# Altium PCB demod_blank.PcbDoc
Units mil, origin at the board's own origin, x right, y up, seen from the top; angles counter-clockwise.
Board outline 1500 x 3550 mil, 2 copper layers (Top Layer, Bottom Layer); 43 components, 30 nets, 124 pads, 2 vias.
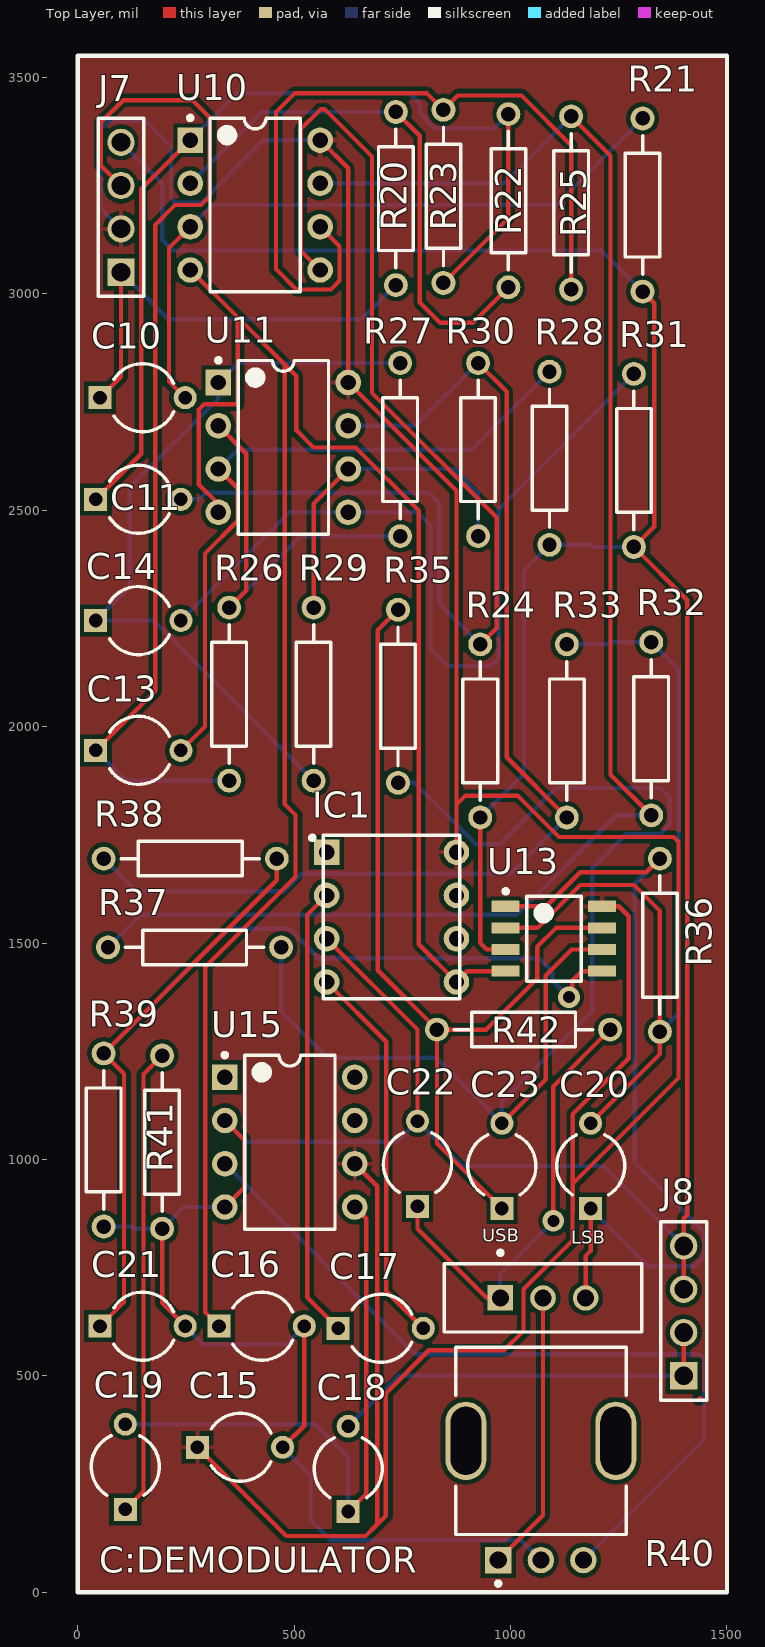
[diagram p0: Top Layer view]
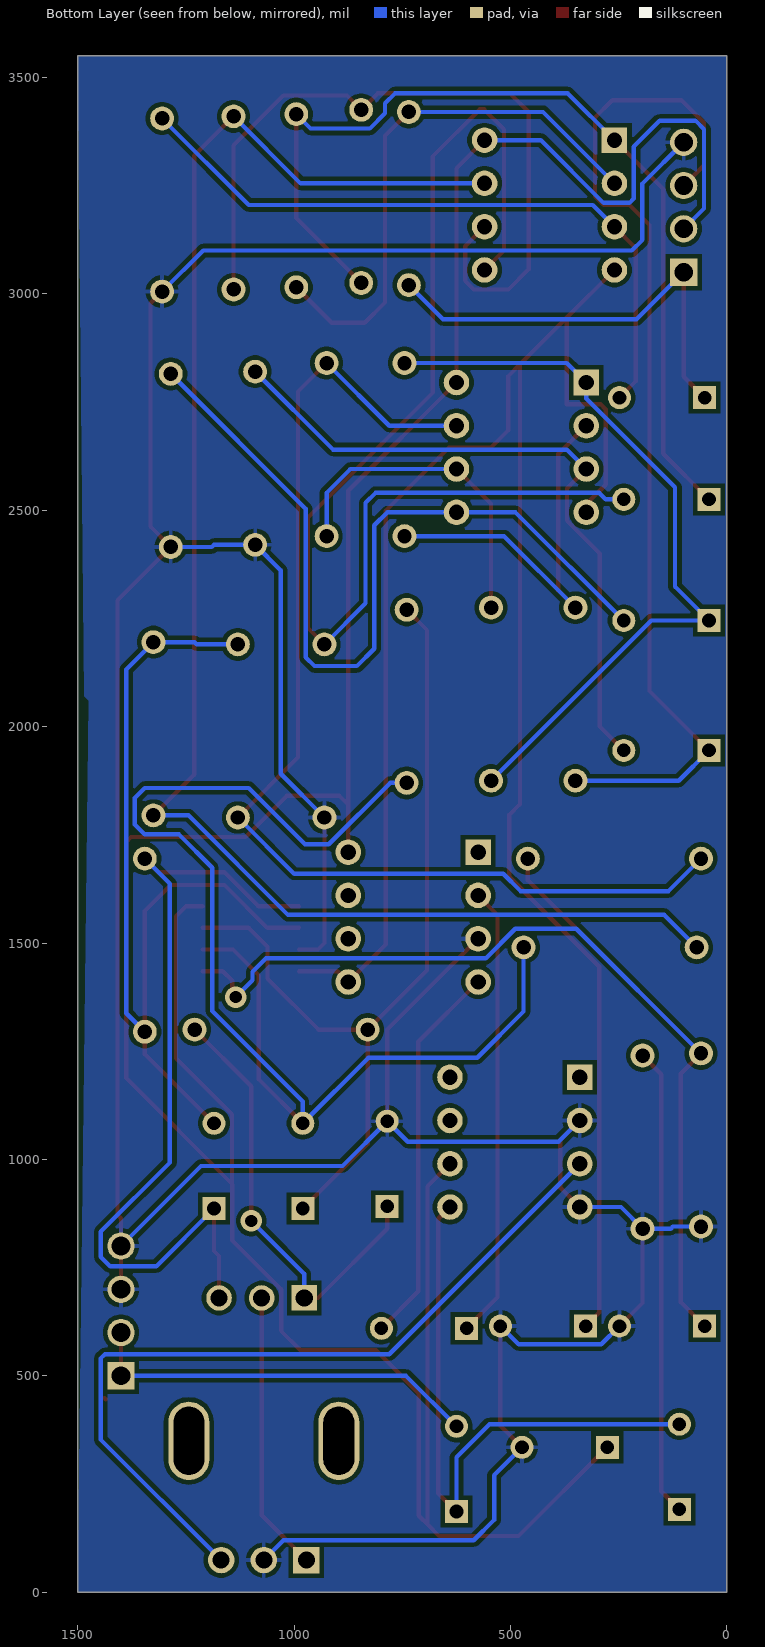
[diagram p1: Bottom Layer view, seen from below]

## Layer stack, top to bottom
Top Solder: solder mask 0.4, Solder Resist, Dk 3.5
Top Layer: signal copper 1.4
Dielectric 1: dielectric 12.6, FR-4, Dk 4.8
Bottom Layer: signal copper 1.4
Bottom Solder: solder mask 0.4, Solder Resist, Dk 3.5

## Board outline
0,0 0,3550 1500,3550 1500,0

## Design rules (kind name [scope] priority, off if disabled: settings)
Clearance [All] p1: gap=10 ignorepadtopadclearanceinfootprint=FALSE except(0: Arc-Hole Track-Hole SMDPad-Hole THPad-Hole Via-Hole Fill-Hole Poly-Hole Region-Hole Text-Hole)
PolygonConnect [All] p1: connectstyle=Relief reliefconductorwidth=10 reliefentries=4 polygonreliefangle="90 Angle" airgapwidth=10
RoutingVias [All] p1: holewidth=28 width=50 viastyle="Through Hole" minholewidth=28 minwidth=50 maxholewidth=28 maxwidth=50
SolderMaskExpansion [All] p1: expansion=4 istentingtop=FALSE
Width [All] p1: maxlimit=10 minlimit=10 preferedwidth=10
30 further rules are at their usual default settings.

## Classes and differential pairs
component class Twostagedesign: C10 C11 C13 C14 C15 C16 C17 C18 C19 C20 C21 C22 C23 IC1 J7 J8 R20 R21 R22 R23 R24 R25 R26 R27 R28 R29 R30 R31 R32 R33 R35 R36 R37 R38 R39 R40 R41 U10 U11 U15

## Components (designator, comment, footprint, x,y, rotation, side; value= is the part's Value field where it differs from the comment)
C10 "Cap2" CAPR5-4X5 150,2760 r0 top value=0.001uF
C11 "Cap2" CAPR5-4X5 140,2525 r0 top value=0.001uF
C13 "Cap2" CAPR5-4X5 140,1945 r0 top value=0.01uF
C14 "Cap2" CAPR5-4X5 140,2245 r0 top value=0.001uF
C15 "Cap Pol1" CAPR5-4X5 375,335 r0 top value=0.1uF
C16 "Cap Pol1" CAPR5-4X5 425,615 r0 top value=10uF
C17 "Cap Pol1" CAPR5-4X5 700,610 r0 top value=10uF
C18 "Cap Pol1" CAPR5-4X5 625,285 r90 top value=1000uF
C19 "Cap" CAPR5-4X5 110,290 r90 top value=0.1uF
C20 "Cap" CAPR5-4X5 1185,985 r90 top value=0.1uF
C21 "Cap" CAPR5-4X5 150,615 r0 top value=0.1uF
C22 "Cap" CAPR5-4X5 785,990 r90 top value=0.1uF
C23 "Cap" CAPR5-4X5 980,985 r90 top value=0.1uF
IC1 "ICL7660SIPAZ" DIP762W45P254L960H533Q8B 50725,51560 r0 top
J7 "IN" 61300411121 100,3200 r90 top
J8 "IN" 61300411121 1400,650 r90 top
R20 "Res2" AXIAL-0.4 735,3220 r90 top value=13.5k
R21 "Res2" AXIAL-0.4 1305,3205 r90 top value=13.5k
R22 "Res2" AXIAL-0.4 995,3215 r90 top value=13.5k
R23 "Res2" AXIAL-0.4 845,3225 r90 top value=91k
R24 "Res2" AXIAL-0.4 930,1990 r90 top value=91k
R25 "Res2" AXIAL-0.4 1140,3210 r90 top value=91k
R26 "Res2" AXIAL-0.4 350,2075 r90 top value=4.37k
R27 "Res2" AXIAL-0.4 745,2640 r90 top value=4.37k
R28 "Res2" AXIAL-0.4 1090,2620 r90 top value=4.37k
R29 "Res2" AXIAL-0.4 545,2075 r90 top value=180k
R30 "Res2" AXIAL-0.4 925,2640 r90 top value=180k
R31 "Res2" AXIAL-0.4 1285,2615 r90 top value=180k
R32 "Res2" AXIAL-0.4 1325,1995 r90 top value=1K
R33 "Res2" AXIAL-0.4 1130,1990 r90 top value=1K
R35 "Res2" AXIAL-0.4 740,2070 r90 top value=1K
R36 "Res2" AXIAL-0.4 1345,1495 r90 top value=1K
R37 "Res2" AXIAL-0.4 270,1490 r0 top value=1K
R38 "Res2" AXIAL-0.4 260,1695 r0 top value=1K
R39 "Res2" AXIAL-0.4 60,1045 r90 top value=1K
R40 "PTV09A-4020F-A203" FP-PTV09A-4020-MFG 1070,350 r0 top value=20kΩ
R41 "Res2" AXIAL-0.4 195,1040 r90 top value=10
R42 "Res2" AXIAL-0.4 1030,1300 r0 top value=1K
U10 "AD8032ANZ" ADI-N-8 410,3205 r0 top
U11 "AD8032ANZ" ADI-N-8 475,2645 r0 top
U13 "OPA1611AIDR" D0008A_M 1100,1510 r0 top
U15 "LM386N-1/NOPB" P0008A 490,1040 r0 top
? "EG1218" ESWI-EG1218_V 1075,680 r0 top

## Footprints (in the part's own frame and the unit in brackets; to place one, negate y for a bottom-side part, rotate by r counter-clockwise, add the part's x,y. Pads: shape width x height; smd on the part's side, far side on the other; paste and mask are expansions set on the pad)
61300411121 [mm] "Pin Header, pitch 2.54 mm, THT, Vertical, single row, 4p"
  rect 1.6x1.6 hole 1.1: 1(-3.81,0)
  round 1.6 hole 1.1: 2(-1.27,0) 3(1.27,0) 4(3.81,0)
  silkscreen extent -5.23,-1.34 5.23,1.34, body extent -5.08,-1.27 5.08,1.27, height 8.57
ADI-N-8 [mm] "DIP, 8-Leads, Body 9.59x6.6mm, Pitch 2.54mm"
  rect 1.5x1.5 hole 0.9: 1(-3.81,3.81)
  round 1.5 hole 0.9: 2(-3.81,1.27) 3(-3.81,-1.27) 4(-3.81,-3.81) 5(3.81,-3.81) 6(3.81,-1.27) 7(3.81,1.27) 8(3.81,3.81)
  silkscreen extent -3.93,-5.1 2.65,5.23, body extent -3.95,-5.07 3.95,5.07, height 5.33
AXIAL-0.4 [mm] "Axial Device, Thru-Hole; 2 Leads; 0.4 in Pin Spacing"
  round 1.4 hole 0.85: 1(-5.08,0) 2(5.08,0)
  silkscreen extent -4.06,-1.02 4.06,1.02
CAPR5-4X5 [mm] "Capacitor; 2 Leads"
  rect 1.35x1.35 hole 0.8: 1(-2.5,0)
  round 1.35 hole 0.8: 2(2.5,0)
  silkscreen extent -1.69,-2 1.82,2
D0008A_M [mm] "SOIC, 8-Leads, Body 5x4mm, Pitch 1.27mm, IPC Low Density"
  rrect15% 1.65x0.65 smd: 1(-2.825,1.905) 2(-2.825,0.635) 3(-2.825,-0.635) 4(-2.825,-1.905) 5(2.825,-1.905) 6(2.825,-0.635) 7(2.825,0.635) 8(2.825,1.905)
  silkscreen extent -2.95,-2.5 1.6,2.9, body extent -3,-2.45 3,2.45, height 1.63
DIP762W45P254L960H533Q8B [mm] "DIP, 8-Leads, Body 9.6x7.95mm, Pitch 2.54mm"
  rect 1.5x1.5 hole 0.9 mask+0.051: 1(-1273.81,-1266.19)
  round 1.5 hole 0.9 mask+0.051: 2(-1273.81,-1268.73) 3(-1273.81,-1271.27) 4(-1273.81,-1273.81) 5(-1266.19,-1273.81) 6(-1266.19,-1271.27) 7(-1266.19,-1268.73) 8(-1266.19,-1266.19)
  silkscreen extent -1274.77,-1274.8 -1266,-1265.2, body extent -1273.97,-1274.79 -1266.03,-1265.21, height 5.34
ESWI-EG1218_V [mm] "THD, 3-Leads, Body 11.6x4mm, Pitch 2.5mm"
  rect 1.5x1.5 hole 1: 1(-2.5,0)
  round 1.5 hole 1: 2(0,0) 3(2.5,0)
  silkscreen extent -5.8,-2 5.8,2.77, body extent -5.8,-2 5.8,2, height 7.4
FP-PTV09A-4020-MFG [mm]
  rect 1.55x1.55 hole 1 paste-1000 mask+0: 1(-2.5,-7)
  round 1.55 hole 1 paste-1000 mask+0: 2(0,-7) 3(2.5,-7)
  rrect100% 2.4x4.6 hole 4 slot 1.8 at 0 deg paste-1000 mask+0: 4(-4.4,0) 5(4.4,0)
  silkscreen extent -5,-8.5 5,5.5, body extent -5.8,-7.88 5.8,5.6, height 0.25
P0008A [mm] "DIP, 8-Leads, Body 10.15x6.6mm, Pitch 2.54mm"
  rect 1.5x1.5 hole 0.9: 1(-3.81,3.81)
  round 1.5 hole 0.9: 2(-3.81,1.27) 3(-3.81,-1.27) 4(-3.81,-3.81) 5(3.81,-3.81) 6(3.81,-1.27) 7(3.81,1.27) 8(3.81,3.81)
  silkscreen extent -3.93,-5.1 2.65,5.23, body extent -3.95,-5.07 3.95,5.07, height 5.08

## Part data
C10 C11 C14: "Capacitor", Supplier Part Number 1=598-CD19FD102FO3F, PackageDescription="Capacitor; 2 Leads", PackageReference=CAPR5-4X5, Published=23-Sep-2002, Publisher="Altium Limited", Supplier 1=Mouser
C13: "Capacitor", Supplier Part Number 1=598-CD19FA103FO3F, PackageDescription="Capacitor; 2 Leads", PackageReference=CAPR5-4X5, Published=23-Sep-2002, Publisher="Altium Limited", Supplier 1=Mouser
C15 C16 C17 C18: "Polarized Capacitor (Radial)", LatestRevisionDate=17-Jul-2002, LatestRevisionNote="Re-released for DXP Platform.", PackageDescription="Polarized Capacitor (Radial); 2 Leads", PackageReference=RB7.6-15, Published=8-Jun-2000, Publisher="Altium Limited"
C19 C20 C21 C22 C23: "Capacitor", LatestRevisionDate=17-Jul-2002, LatestRevisionNote="Re-released for DXP Platform.", PackageDescription="Radial Cap, Thru-Hole; 2 Leads; 0.3 in Pin Spacing", PackageReference=RAD-0.3, Published=8-Jun-2000, Publisher="Altium Limited"
IC1: library part CMP-00572-88254228-1, "ICL7660SIPAZ Charge Pump INV/STPUP/STPDN -1.5V to -12V/1.5V to 22.8V 45mA 8-Pin PDIP Tube", Frequency=10kHz, Output Current=45mA, Output Voltage=-1.5V, NexarPartId=88254228, Output Type=Adjustable, Packaging="Cut Tape", RoHS=Compliant
J7 J8: library part MHDR1X4, "Header, 4-Pin", LatestRevisionDate=17-Jul-2002, LatestRevisionNote="Re-released for DXP Platform.", Publisher="Altium Limited"
R20 R21 R22: "Resistor", Supplier Part Number 1=ALSR5J-13.5K-ND, LatestRevisionDate=17-Jul-2002, LatestRevisionNote="Re-released for DXP Platform.", PackageDescription="Axial Device, Thru-Hole; 2 Leads; 0.4 in Pin Spacing", PackageReference=AXIAL-0.4, Published=8-Jun-2000, Publisher="Altium Limited", Supplier 1=Digikey
R23 R24 R25: "Resistor", Supplier Part Number 1=603-MFR-25FTE52-91K, LatestRevisionDate=17-Jul-2002, LatestRevisionNote="Re-released for DXP Platform.", PackageDescription="Axial Device, Thru-Hole; 2 Leads; 0.4 in Pin Spacing", PackageReference=AXIAL-0.4, Published=8-Jun-2000, Publisher="Altium Limited", Supplier 1=Mouser
R26 R27 R28: "Resistor", Supplier Part Number 1=RN55C4371BB14-ND, LatestRevisionDate=17-Jul-2002, LatestRevisionNote="Re-released for DXP Platform.", PackageDescription="Axial Device, Thru-Hole; 2 Leads; 0.4 in Pin Spacing", PackageReference=AXIAL-0.4, Published=8-Jun-2000, Publisher="Altium Limited", Supplier 1=Digikey
R29 R30 R31: "Resistor", Supplier Part Number 1=594-MBB02070C1803DC1, LatestRevisionDate=17-Jul-2002, LatestRevisionNote="Re-released for DXP Platform.", PackageDescription="Axial Device, Thru-Hole; 2 Leads; 0.4 in Pin Spacing", PackageReference=AXIAL-0.4, Published=8-Jun-2000, Publisher="Altium Limited", Supplier 1=Mouser
R32 R33 R35 R36 R37 R38 R39 R41 R42: "Resistor", Supplier Part Number 1=RNMF14FTC2K00, LatestRevisionDate=17-Jul-2002, LatestRevisionNote="Re-released for DXP Platform.", PackageDescription="Axial Device, Thru-Hole; 2 Leads; 0.4 in Pin Spacing", PackageReference=AXIAL-0.4, Published=8-Jun-2000, Publisher="Altium Limited", Supplier 1="Arrow Electronics"
R40: library part CMP-07234-000017-1, "POT 20K OHM 1/20W CARBON LOG", Manufacturer="Bourns Inc.", Package=PTV09A-4020, Power Rating=0.05W, Resistance=20kΩ, Temperature="-10°C to +50°C", Temperature Range High=+50°C, Temperature Range Low=-10°C, Tolerance=20%, Voltage Rating=50V, Automotive=No, Category=Res, ComponentLink2Description=Datasheet, ComponentLink2URL=https://www.bourns.com/docs/product-datasheets/ptv09.pdf?sfvrsn=5e1089f1_12, Composition=Carbon, Device Class L1="Passive Components", Device Class L2=Resistors, Device Class L3="Variable Resistors and Potentiometers", Digikey Description="POT 20K OHM 1/20W CARBON LOG", Height=20.5mm, Lead Free=Yes, Manufacturer Part Number=PTV09A-4020F-A203, Mouser Description="Potentiometers 20K AUDIO 20%", Octopart=https://octopart.com/ptv09a-4020f-a203-bourns-1637636, RoHS=TRUE, Series=PTV09
U10 U11: library part CMP-0384-00245-2, "Double Channel RRIO Operational Amplifier, 80 MHz BW, 35 V/us SR, Industrial, 8-pin DIP (N-8), Tube", Amplifiers Per Package=2, Generic Part Number=AD8032, Input Bias Current=450nA, Input Offset Voltage=1mV, Manufacturer="Analog Devices", Code_JEDEC=MS-001, ComponentLink1Description="Manufacturer URL", ComponentLink1URL=http://www.analog.com/en/index.html, ComponentLink2Description=Datasheet, ComponentLink2URL=http://www.analog.com/static/imported-files/data_sheets/AD8031_8032.pdf, ComponentLink3Description="Package Specification", ComponentLink3URL=http:/www.analog.com/static/imported-files/packages/PKG_PDF/PDIP(N)/N_8.pdf, ComponentLink4Description="Reference Circuit", ComponentLink4URL=http://www.analog.com/en/all-operational-amplifiers-op-amps/operational-amplifiers-op-amps/ad8032/products/product.html#product-recommendations, DatasheetVersion="Rev. D", Iq/Amp=1.6mA, Mounting Technology="Through Hole", PackageDescription="8-Pin Plastic Dual In-Line Package, Row spacing 7.62 mm, Pitch 2.54 mm", PackageReference=N-8, PackageVersion=070606-A, Packing=Tube, PartNumber=AD8032ANZ, RevisionNote="Reference Circuit URL fixed", Slew Rate=35V/us, Small Signal Bandwidth=80MHz, V Span Max=12V, V Span Min=2.7V
U13: library part CMP-0808-00013-2, "1.1 nV/rtHz Noise, Low Power, Precision Operational Amplifier, 4.5 to 36 V, -40 to 85 degC, 8-pin SOIC (D8), Green (RoHS & no Sb/Br)", Manufacturer="Texas Instruments", PartNumber=OPA1612AID, Code_JEDEC=MS-012, ComponentLink1Description="Manufacturer URL", ComponentLink1URL=http://www.ti.com/, ComponentLink2Description=Datasheet, ComponentLink2URL=http://www.ti.com/general/docs/lit/getliterature.tsp?genericPartNumber=OPA1612&fileType=pdf, ComponentLink3Description="Package Specification", ComponentLink3URL=http://www.ti.com/litv/pdf/msoi002j, DatasheetVersion=SBOS450B, Eco-Plan="Green (RoHS & no Sb/Br)", GBW(Typ)(MHz)=40, Iq per channel(Max)(mA)=4.5, Mounting Technology="Surface Mount", Number of Channels=2, PackageDescription="8-Pin Plastic Small Outline, Body 4.9 x 3.9 mm, Pitch 1.27 mm", PackageReference=D0008A, PackageVersion="4040047-3/M, 06/2011", SubFamily="Audio Operational Amplifier", Vmax(V)=36, Vmin(V)=4.5, Vn at Flatband(Typ)(nV/rtHz)=1.1
U15: library part CMP-0057-00052-4, "Low Voltage Audio Power Amplifier, 8-pin MDIP, Pb-Free", Manufacturer="Texas Instruments", PackageTopMarking=NSUZXYTTE#*LM*386N-1, PowerWise=N, Code_JEDEC=MS-001-BA, ComponentLink1Description="Datasheet URL", ComponentLink1URL=http://www.ti.com/general/docs/lit/getliterature.tsp?genericPartNumber=LM386&fileType=pdf, CompType="Audio IC", PackageDescription="MDIP, .365 x .250 x .130in, 8 Lead, .100in Pitch", PackageReference=P0008A, PinCount=8, RoHS=Y
?: library part CMP-1696-00002-1, "Slide Switch, 500 V, -20 to 70 degC, 3-Pin THD, RoHS", Case\Package=SOT-23-5, Dropout Voltage="300 mV", Max Input Voltage="8 V", Max Operating Temperature="85 degC", Max Ouput Current="150 mA", Max Power Dissipation="250 mW", Min Input Voltage="4.3 V", Min Operating Temperature="-40 degC", Nominal Output Voltage="3.3 V", Package Quantity=3000, ComponentLink1Description="Manufacturer URL", ComponentLink1URL=http://www.e-switch.ch/en/, ComponentLink2Description=Datasheet, ComponentLink2URL=https://www.e-switch.com/system/asset/product_line/data_sheet/119/EG.pdf, DatasheetVersion=Oct-15, Height="1.3 mm", Length="3 mm", Mount="Surface Mount", Output Current="150 mA", Output Voltage="3.3 V", Outputs=1, PackageDescription="3-Pin Through Hole Device, Body 11.6 x 4 mm, Pitch 2.5 mm", PackageReference=EG1218, Packaging="Tape and Reel", Pins=5, Power Rating="250 mW", Radiation Hardening=No, REACH SVHC="No SVHC", RoHSCompliant=true, Width="1.8 mm"

## Via types
v1: diameter 50, hole 28, Top Layer to Bottom Layer, 2 vias

## Nets (pads, with @x,y where several pads share a name; then routed paths per layer and width w, separated by ;. In a path a pad name is that pad's centre, name@x,y a point inside that pad or via, vN(x,y) a via of type N, cw(c..) or ccw(c..) an arc to the next point about the centre after c; other vN are vias at no path point)
+5: C15.1 IC1.8 J7.2 U10.8 U11.8 U13.8 U15.6 | length 7521.7
  Top Layer w10: C15.1 481.57,130 665,130 692,157 ; U10.8 625,3290 U11.8 875,2545 875,1820 ; U15.6 692,938 692,157 ; IC1.8 875,1820 ; U13.8 1250,1585 1273,1562 1273,1234 1143.42,1104.42 1143.42,943.42 ; 692,157 712,177 712,460 811,559 985,559 1030,604 1030,700 1143,813 ; 875,1820 895,1840 1017,1840 1112,1745 1377,1745 1388,1734 1388,1188 1143.42,943.42 ; 1143,813 1143,943 1143.42,943.42 ; 1143,813 1143.42,943.42
  Bottom Layer w10: J7.2 53,3197 53,3380 73,3400 155.47,3400 215.47,3340 215.47,3220 225.47,3210 285,3210 430,3355 U10.8
GND: C15.2 C16.2 C21.2 C22.2 IC1.3 J7.4 J8.3 J8.4 R21.1 R24.1 R28.1 R31.1 R39.1 R40.2 R41.1 U13.3 U15.2 U15.4 | length 8953.1
  Top Layer w10: R41.1 195,668.43 C21.2 ; U15.4 385,935 385,1045 U15.2 ; C15.2 523.43,385 C16.2 ; IC1.3 785,1300 C22.2 ; R24.1 930,1500 945,1485 U13.3 ; R21.1 1332,2978 1332,2462 R31.1 1408,2292 1408,872 1400,864 J8.4 J8.3
  Bottom Layer w10: R39.1 125,845 130,840 R41.1 245,890 U15.4 ; J7.4 195.47,3254.53 195.47,3124.53 220,3100 1210,3100 R21.1 ; C21.2 290.43,573 481.43,573 C16.2 ; U15.2 389,1041 737.57,1041 C22.2 888.43,985 1215,985 J8.4 ; C15.2 538,270.43 538,167 585,120 1024.41,120 R40.2 ; R24.1 1031,1891 1031,2361 R28.1 1185,2420 1190,2415 R31.1
Net_1: ?.1 C22.1 R42.2 | length 1034.4
  Top Layer w10: C22.1 785,840 945,680 ?.1 ; v1(1099,858) 1099,1169 R42.2
  Bottom Layer w10: ?.1 976.58,735.58 v1(1099,858)
Net_2: ?.2 R40.1 | length 648.4
  Top Layer w10: R40.1 1075,177.84 ?.2
Net_3: ?.3 C20.1 R36.2 U13.1 | length 1949.9
  Top Layer w10: U13.1 1082.62,1585 1160.98,1663.36 1313.36,1663.36 R36.2 ; ?.3 1173.43,777 1185,788.57 C20.1
  Bottom Layer w10: C20.1 1318.57,753 1425,753 1447,775 1447,833 1287,993 1287,1637 R36.2
NetC10_1: C10.1 J7.1 R20.1 | length 1022.9
  Top Layer w10: C10.1 100,2808.43 J7.1
  Bottom Layer w10: J7.1 209,2941 656,2941 R20.1
NetC10_2: C10.2 R21.2 U10.3 | length 1579.4
  Top Layer w10: C10.2 211,2797.43 211,3106 U10.3
  Bottom Layer w10: U10.3 310,3205 1105,3205 R21.2
NetC11_1: C11.1 R22.2 R23.1 U10.1 | length 2213
  Top Layer w10: C11.1 147,2630.43 147,3242 U10.1 ; R23.1 995,3175 R22.2
  Bottom Layer w10: U10.1 368,3463 767,3463 790,3440 790,3417 825,3382 962,3382 R22.2
NetC11_2: C11.2 R24.2 U10.5 | length 2813.5
  Top Layer w10: U10.5 515,3100 515,3380 561,3426 571,3426 680,3317 680,2771 968,2483 968,2228 R24.2
  Bottom Layer w10: C11.2 280,2525 295,2540 812,2540 835,2517 835,2285 R24.2
NetC13_1: C13.1 J7.3 R26.1 | length 2398.3
  Top Layer w10: C13.1 179,2082.43 179,3159 225,3205 285,3205 305,3225 305,3407 265,3447 105,3447 53,3395 53,3297 J7.3
  Bottom Layer w10: C13.1 111.57,1875 R26.1
NetC13_2: C13.2 R28.2 U11.3 | length 1580.9
  Top Layer w10: C13.2 294,2000.57 294,2400 369.53,2475.53 369.53,2550.47 U11.3
  Bottom Layer w10: U11.3 370,2640 910,2640 R28.2
NetC14_1: C14.1 R27.2 R29.1 U11.1 | length 1762.7
  Bottom Layer w10: R29.1 175,2245 C14.1 120,2323.43 120,2552.97 325,2757.97 U11.1 370,2840 R27.2
NetC14_2: C14.2 R31.2 U11.5 | length 1944.6
  Bottom Layer w10: C14.2 488.43,2495 U11.5 785,2495 815,2465 815,2180 855,2140 953,2140 973,2160 973,2503 R31.2
NetC16_1: C16.1 IC1.5 U10.4 U11.4 U13.4 | length 4963.8
  Top Layer w10: U10.4 370,2945 ; U11.4 325,2514 280,2559 280,2732.78 292.22,2745 370,2745 370,2945 ; C16.1 295,646.57 295,1445 503,1653 503,1796 478,1821 478,2837 ; U13.4 900,1435 IC1.5 788,1497 788,2499 642,2645 545,2645 505,2685 505,2810 478,2837 ; 370,2945 478,2837
NetC17_1: C17.1 IC1.2 | length 1048.3
  Top Layer w10: IC1.2 530,1565 530,681.57 C17.1
NetC17_2: C17.2 IC1.4 | length 892.5
  Top Layer w10: IC1.4 713,1272 713,695.43 C17.2
NetC18_1: C18.1 C19.2 U15.5 | length 1404.1
  Top Layer w10: C18.1 667,228.57 667,863 U15.5
  Bottom Layer w10: C19.2 548.57,388.43 625,312 C18.1
NetC18_2: C18.2 J8.1 J8.2 | length 923.3
  Top Layer w10: J8.1 J8.2
  Bottom Layer w10: C18.2 741.57,500 J8.1
NetC19_1: C19.1 R41.2 | length 1083.6
  Top Layer w10: C19.1 152,233.57 152,1197 R41.2
NetC20_2: C20.2 R32.2 R33.2 R36.1 U13.2 | length 2119.9
  Top Layer w10: U13.2 1062,1535 1161,1634 1285,1634 1345,1574 R36.1 1345,1243.43 C20.2
  Bottom Layer w10: R33.2 1225,2190 1230,2195 R32.2 1388,2132 1388,1338 R36.1
NetC21_1: C21.1 R38.2 R39.2 U13.5 | length 2678.2
  Top Layer w10: C21.1 107,670.43 107,1198 R39.2 460,1645 R38.2 ; v1(1135,1375) 1142.65,1382.65 1142.65,1412.65 1165,1435 U13.5
  Bottom Layer w10: R39.2 348,1533 489,1533 557,1465 1065,1465 1096.17,1433.83 1096.17,1413.83 v1(1135,1375)
NetC23_1: C23.1 R35.2 R42.1 U13.7 | length 2043.7
  Top Layer w10: R35.2 693,2223 693,1437 R42.1 ; C23.1 830,1036.57 R42.1 ; U13.7 1105,1535 1061.37,1491.37 1061.37,1417.37 944,1300 R42.1
NetC23_2: C23.2 R35.1 R37.2 U13.6 | length 3012.1
  Top Layer w10: C23.2 1081.37,1184.79 1081.37,1425 1141.37,1485 U13.6
  Bottom Layer w10: R37.2 470,1342 577,1235 828.43,1235 C23.2 980,1134 1189,1343 1189,1674 1266,1751 1345,1751 1368,1774 1368,1835 1345,1858 1105,1858 975,1728 919.97,1728 777.97,1870 R35.1
NetR20_2: R20.2 R22.1 U10.2 | length 1264.6
  Top Layer w10: R20.2 790,3365 790,2980 837,2933 913,2933 R22.1
  Bottom Layer w10: U10.2 425,3420 R20.2
NetR23_2: R23.2 R25.1 U10.6 | length 1791.2
  Top Layer w10: U10.6 605,3110 605,3030 585,3010 505,3010 458,3057 458,3420 501,3463 807,3463 R23.2 878,3458 1025,3458 1140,3343 R25.1
NetR25_2: R25.2 R32.1 R37.1 U10.7 | length 3717.2
  Top Layer w10: R25.2 1231,3319 1231,1889 R32.1
  Bottom Layer w10: R37.1 145,1565 1014,1565 1244,1795 R32.1 ; U10.7 985,3255 R25.2
NetR26_2: R26.2 R27.1 U11.2 | length 926.4
  Top Layer w10: U11.2 389.53,2630.47 389.53,2314.53 R26.2
  Bottom Layer w10: R26.2 515,2440 R27.1
NetR29_2: R29.2 R30.1 U11.6 | length 775.9
  Top Layer w10: R29.2 545,2515 U11.6
  Bottom Layer w10: U11.6 870,2595 925,2540 R30.1
NetR30_2: R30.2 R33.1 R38.1 U11.7 | length 2666.5
  Top Layer w10: R30.2 991,2774 991,1929 R33.1
  Bottom Layer w10: R38.1 135,1620 477,1620 517,1660 1000,1660 R33.1 ; U11.7 780,2695 R30.2
NetR40_3: R40.3 U15.3 | length 1874.4
  Bottom Layer w10: U15.3 780,550 1437,550 1447,540 1447,352.98 R40.3
pads on no net: IC1.1 IC1.6 IC1.7 R40.4 R40.5 U15.1 U15.7 U15.8
copper on no net: | length 4.1
  Top Layer w10: 1435,446 1437.93,448.93

## Polygon pours and split planes (outlines as drawn)
GND on Bottom Layer "GND_L02_P000" (solid, pour order 0): 0,0 1500,0 1475,2060 1485,2070 1500,3550 0,3550
+5 on Top Layer "+5_L01_P001" (solid, pour order 1): 0,1345 0,0 1500,0 1500,3550 1147.49,3550 925,3550 0,3550

## Silkscreen, mask and mechanical layers (free items; w line width, h text height)
Top Overlay:
  the board outline again, w10
  text "USB" at 935,810 h30
  text "LSB" at 1140,805 h30
  text "C:DEMODULATOR" at 50,45 h60
Mechanical 1:
  the board outline again, w10